# Altium PCB PcbDoc_JavierLopezIniesta_RodrigoMoratilla.PcbDoc (part 2 of 2)
Units mm, origin at the board's own origin, x right, y up, seen from the top; angles counter-clockwise.
Board outline 50 x 50 mm, 4 copper layers (Top Layer, Int1 (GND), Int2 (PWR), Bottom Layer), stack 1.369 mm thick; 104 components, 112 nets, 567 pads, 251 vias.
Unrouted connection lines stored in the file: 2.
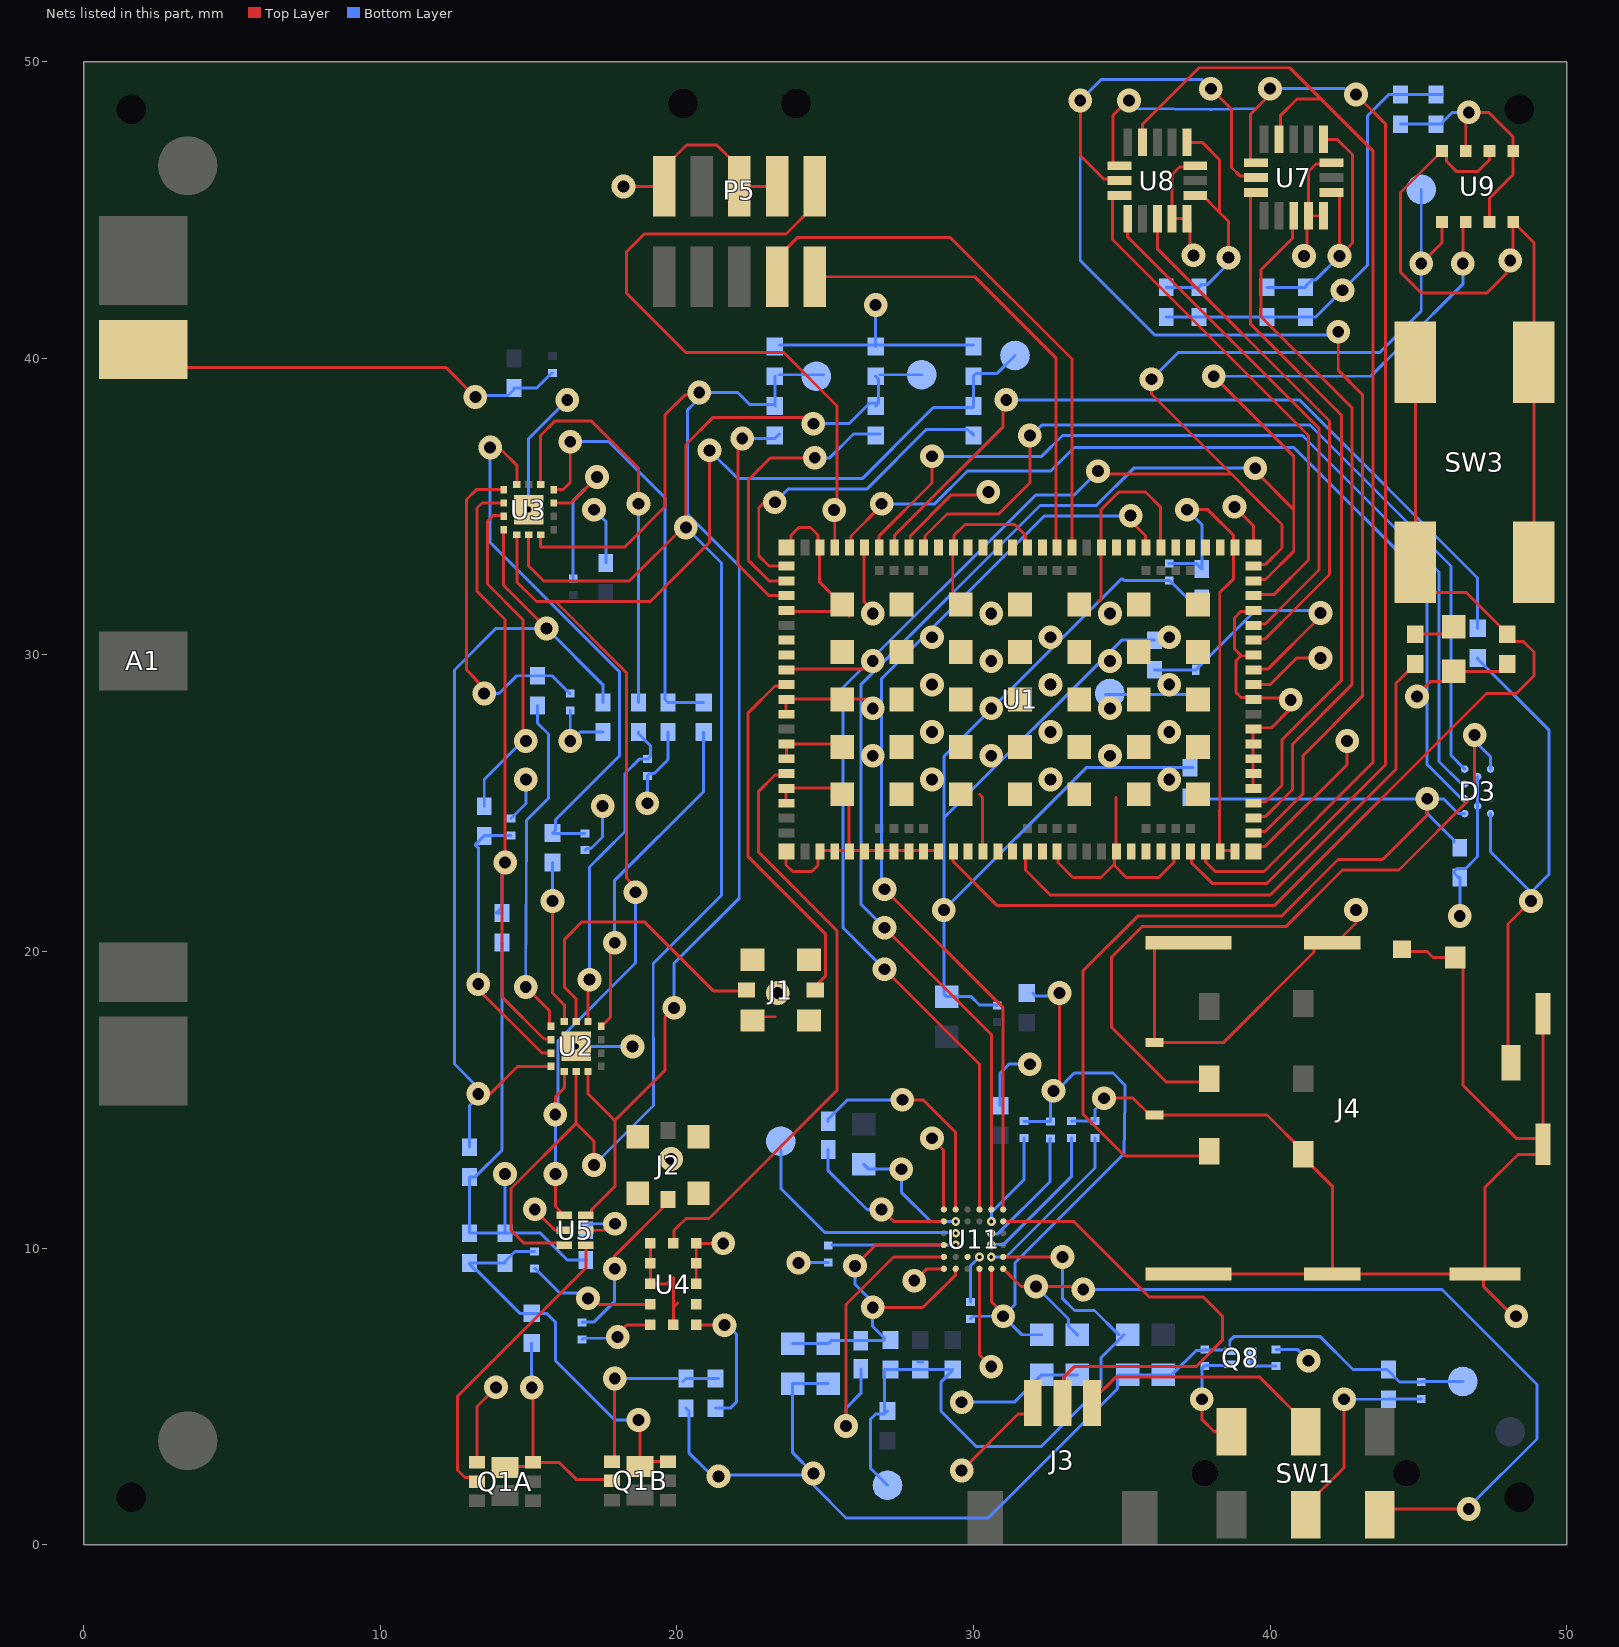
[diagram p4: the nets of this part, all layers, seen from the top]

## Via types
v1: diameter 0.8, hole 0.4, Int2 (PWR) to Bottom Layer, 82 vias
v2: diameter 0.8 (per signal layer), hole 0.4, Top Layer to Int2 (PWR), 64 vias
v3: diameter 0.8, hole 0.4, Top Layer to Int1 (GND), 46 vias
v4: diameter 0.8, hole 0.4, Top Layer to Int2 (PWR), 18 vias
v5: diameter 0.8, hole 0.4, Int1 (GND) to Bottom Layer, 14 vias
v6: diameter 0.3, hole 0.13, Top Layer to Bottom Layer, 10 vias
v7: diameter 0.8, hole 0.4, Top Layer to Bottom Layer, 8 vias
v8: diameter 0.8 (per signal layer), hole 0.4, Int1 (GND) to Bottom Layer, 6 vias
v9: diameter 0.5, hole 0.2, Top Layer to Bottom Layer, 2 vias
v10: diameter 0.3, hole 0.12, Top Layer to Bottom Layer, 1 vias

## Nets (pads, with @x,y where several pads share a name; then routed paths per layer and width w, separated by ;. In a path a pad name is that pad's centre, name@x,y a point inside that pad or via, vN(x,y) a via of type N, cw(c..) or ccw(c..) an arc to the next point about the centre after c; other vN are vias at no path point) (continued)
GND: C1.1 C2.1 C3.1 C4.1 C5.1 C6.1 C7.1 C8.1 C12.1 C13.1 C14.1 C16.1 C17.1 C36.1 C37.1 C38.1 C39.1 C40.1 C41.1 C43.1 C44.1 C46.1 C47.1 C48.1 C49.1 C50.1 C51.1 C52.1 C53.1 C54.1 D2.1 D3.B1 D3.B2 J1.2 J2.2 J3.1 J4.0 J4.C5 J4.CSW L4.1 L5.1 L6.1 L7.1 P5.3 P5.5 P5.9 Q1A.1 Q8.2 R4.1 R5.1 R6.1 R12.1 R26.1 R32.1 R35.1 R36.1 R37.1 R48.1 SW3.2 TP6.1 U1.1 U1.5 U1.6 U1.7 U1.8 U1.9 U1.11 U1.14 U1.17 U1.21 U1.27 U1.31 U1.36 U1.41 U1.44 U1.47 U1.50 U1.52 U1.56 U1.60 U1.62 U1.63 U1.65 U1.66 U1.68 U1.69 U1.72 U1.74 U1.75 U1.76 U1.77 U1.78 U1.79 U1.80 U1.81 U1.82 U1.85 U1.90 U1.94 U1.98 U1.103 U2.15 U3.15 U4.2 U4.4 U4.5 U4.6 U4.7 U4.9 U4.10 U4.11 U5.2 U7.12 U7.13 U7.16 U8.12 U8.13 U8.16 U9.1 U9.5 U9.7 U11.A1 U11.B2 U11.F1 U11.F4 | length 349.1
  Top Layer w0.1: Q1A.1@13.255,2.775 13.255,4.659 v3(13.898,5.302) ; v3(15.203,11.303) 15.203,11.28 15.883,10.6 U5.2@16.2,10.6 ; v3(18.2,45.8) 19.56,45.8 P5.9@19.565,45.805 19.565,46.44 20.325,47.2 21.345,47.2 22.105,46.44 P5.5@22.105,45.805 P5.3@23.375,45.805 ; U4.9@19.1,10.158 U4.10@19.1,9.484 U4.11@19.1,8.792 19.667,8.792 19.875,9 19.875,8 ; U4.2@19.875,7.408 19.875,8 ; 20.025,8.15 19.875,8 ; U4.5@20.65,8.792 U4.6@20.65,9.484 U4.7@20.65,10.158 v3(21.558,10.158) ; J1.2@22.55,17.675 22.675,17.8 23.3,17.8 ; U1.56@23.654,31.454 U1.56@23.7,31.5 ; U1.72@23.68,23.4 23.68,22.921 23.9,22.7 24.541,22.7 24.754,22.913 24.754,23.354 24.8,23.4 U1.76@25.8,23.4 ; U1.69@23.68,25.02 23.68,25.52 25.35,25.52 U1.103@25.55,25.32 ; U1.63@23.68,28.02 23.68,28.52 26.58,28.52 v3@26.6,28.5 ; U1.60@23.68,29.52 26.52,29.52 v3@26.6,29.6 ; U1.56@23.68,31.52 23.726,31.474 25.626,31.474 U1.103@25.8,31.3 ; U1.52@23.68,33.64 23.846,33.806 23.846,34.036 24.11,34.3 24.5,34.3 24.754,34.046 24.754,33.686 24.8,33.64 24.8,32.47 U1.103@25.55,31.72 ; U1.66@23.7,26.5 U1.65@23.7,27 25.47,27 U1.103@25.57,26.9 ; U1.63@23.7,28 U1.63@23.746,27.954 ; U1.103@25.23,25.26 25.25,25.24 25.27,25.26 25.77,25.26 25.8,25.23 U1.76@25.8,23.4 ; U1.103@25.52,27.18 25.645,27.055 U1.103@25.61,27.02 ; U1.47@26.3,33.64 26.3,31.8 v3@26.4,31.7 ; U1.103@27.27,25.26 U1.103@27.77,25.26 ; U1.44@27.82,33.62 27.866,33.666 27.866,34.017 29.249,35.4 30.4,35.4 v3(30.5,35.5) ; v3@28,9.146 v3(28,8.9) 28.024,8.9 28.424,9.3 28.915,9.3 ccw(c29,9.7) 28.991,9.291 U11.F1@29,9.3 ; v3(28.6,13.7) 28.991,13.309 28.991,11.309 U11.A1@29,11.3 ; U1.82@28.8,23.4 U1.76@25.8,23.4 ; U1.103@29.55,31.72 29.3,31.97 29.3,33.64 29.346,33.686 29.346,34.036 29.71,34.4 31.39,34.4 31.754,34.036 31.754,33.686 U1.36@31.8,33.64 ; v3(29.6,2.5) 31.5,4.4 31.75,4.4 32,4.65 J3.1@32,4.775 ; U11.F4@30.2,9.3 30.2,6.4 v3(30.6,6) 30.6,6.195 v3@30.5,6.295 ; 30.2,25.3 30.3,25.2 U1.85@30.3,23.4 ; U1.90@32.8,23.4 32.846,23.354 32.846,23.004 33.35,22.5 34.3,22.5 34.754,22.954 ; 34.2,31.8 34.3,31.9 U1.31@34.3,33.53 ; U1.31@34.27,33.5 U1.31@34.3,33.53 ; U1.31@34.316,33.546 U1.31@34.3,33.53 ; v1(34.404,15.052) 35.383,15.052 35.95,14.485 J4.0@36.1,14.485 39.9,14.485 41.12,13.265 J4.C5@41.12,13.165 41.12,13.065 42.1,12.085 J4.0@42.1,9.125 ; 34.8,25.2 34.8,23.4 34.754,23.354 34.754,22.954 ; U1.27@36.3,33.64 36.3,35 35.8,35.5 34.9,35.5 34.3,34.9 U1.31@34.3,33.53 ; U1.98@36.8,23.4 36.754,23.354 36.754,23.004 36.25,22.5 35.154,22.5 34.754,22.9 34.754,22.954 ; J4.0@37.25,9.125 J4.0@42.1,9.125 ; J4.0@37.25,20.3 36.275,20.3 36.1,20.125 J4.0@36.1,16.925 38.425,16.925 41.484,19.984 41.484,20.125 41.659,20.3 42.241,20.3 42.9,20.959 v3(42.9,21.4) ; v3(37.42,43.476) 37.3,43.596 37.3,44.612 U8.13@37.2,44.712 U8.12@36.7,44.712 36.7,46.205 36.949,46.454 37.429,46.454 U8.16@37.475,46.5 ; v3(38.8,34.996) 39.44,34.356 U1.21@39.44,33.62 ; U1.5@39.42,25.52 39.42,27.52 39.446,27.546 40.046,27.546 40.7,28.2 v3(40.7,28.487) ; U1.14@39.42,30.02 39.374,29.974 39.026,29.974 ; U1.17@39.42,31.52 39.374,31.474 39.024,31.474 38.8,31.25 38.8,30.2 39.026,29.974 ; U1.1@39.44,23.38 39.606,23.546 39.838,23.546 42.6,26.308 v3(42.6,27.1) ; v3@40.641,28.546 39.486,28.546 U1.11@39.44,28.5 39.374,28.566 39.024,28.566 38.846,28.744 38.846,29.796 39.024,29.974 39.026,29.974 ; v3(41.148,43.452) 41.254,43.558 41.254,44.766 U7.12@41.3,44.812 ; U7.13@41.8,44.812 U7.12@41.3,44.812 ; U7.16@42.075,46.6 42.029,46.554 41.549,46.554 41.3,46.305 U7.12@41.3,44.812 ; J4.CSW@44.45,20.075 44.525,20 45.3,20 45.5,19.8 J4.0@46.25,19.8 46.5,19.55 46.5,15.5 48.3,13.7 49.005,13.7 J4.0@49.2,13.505 ; v3(44.958,28.6) 44.958,28.658 45.4,29.1 45.85,29.1 D2.1@46.2,29.45 47.775,29.45 48,29.675 R12.1@48,29.7 ; U9.7@47.4,47 47.4,46.7 47,46.3 46.3,46.3 45.95,46.65 45.95,46.85 U9.5@45.8,47 44.396,45.596 44.396,42.908 45.104,42.2 47.3,42.2 47.966,42.866 47.966,43.166 v3(48.1,43.3) 48.2,43.4 U9.1@48.2,44.6 48.9,43.9 SW3.2@48.9,39.875 SW3.2@48.9,33.125 ; v3(48.3,7.7) 48.2,7.7 47.191,8.709 47.191,9.066 J4.0@47.25,9.125 ; J4.0@49.2,17.905 J4.0@49.2,13.505 ; J4.0@42.1,9.125 J4.0@47.25,9.125 ; J4.0@47.25,9.125 47.25,12.05 48.359,13.159 49,13.159 49.2,13.359 J4.0@49.2,13.505
  Bottom Layer w0.1: C12.1@14.1,20.3 14.1,13.3 13.2,12.4 C16.1@13,12.4 C6.1@13,10.5 C5.1@14.2,10.5 ; v8(14.2,12.5) C5.1@14.2,10.5 ; L4.1@14.4,24.485 14.904,24.989 v8(14.904,25.8) ; v9(15,34.9) 15,37.3 15.918,38.218 v5(16.3,38.6) ; L6.1@16.415,28.13 L6.1@16.4,28.13 v8(16.4,27.1) 16.436,27.1 16.736,27.4 C17.1@17.5,27.4 ; v9(16.6,16.8) v5(18.5,16.8) ; L7.1@16.9,23.415 16.955,23.47 17.1,23.47 17.492,23.862 v5(17.492,24.904) ; C8.1@16.925,9.6 16.3,9.6 15.4,10.5 C5.1@14.2,10.5 ; v8(17.204,34.9) 17.6,34.504 C13.1@17.6,33.1 ; v5(19,25) 19,25.4 L5.1@19,25.915 19.085,26 19.23,26 19.7,26.47 C14.1@19.7,27.4 ; C7.1@20.3,4.6 20.4,4.5 20.4,3.1 21,2.5 21.011,2.5 21.211,2.3 v5(21.4,2.3) 21.45,2.35 24.55,2.35 v5(24.6,2.4) ; R6.1@23.45,40.45 R5.1@26.7,40.45 ; v5(24.1,9.5) 24.107,9.507 25.092,9.507 R26.1@25.1,9.515 ; C47.1@25.1,5.425 C46.1@23.9,5.425 23.9,3.1 v5(24.6,2.4) ; C49.1@26.3,12.825 26.466,12.659 v5(27.566,12.659) 27.566,11.884 28.55,10.9 v6(29.4,10.9) ; R5.1@26.7,40.4 R5.1@26.7,40.45 ; v8(26.7,41.8) R5.1@26.7,40.45 ; v5(29.6,4.8) 31.375,4.8 C52.1@32.3,5.725 C53.1@33.5,5.725 ; R4.1@30,40.45 26.85,40.45 R5.1@26.7,40.45 ; R35.1@30.8,18.185 30.785,18.2 30.2,18.2 29.925,18.475 C48.1@29.1,18.475 29,18.575 v3(29,21.4) ; R32.1@30.9,14.8 30.9,15.9 31.2,16.2 v5(31.9,16.2) ; R36.1@33.3,14.285 R37.1@34.1,14.285 34.1,14.668 34.352,14.92 34.352,14.965 34.352,15 v1(34.404,15.052) ; C3.1@36.1,30.5 35,30.5 29,24.5 ; C39.1@36.5,41.4 C38.1@37.6,41.4 C37.1@39.9,41.4 C36.1@41.2,41.4 41.542,41.4 v5(42.442,42.3) 43.283,43.141 43.283,48.183 44,48.9 C41.1@44.4,48.9 C40.1@45.8,48.9 ; C4.1@37.397,26.2 33.8,26.2 v3(29,21.4) ; C2.1@37.7,31.9 37.23,31.9 36.615,32.515 C1.1@36.6,32.515 35.085,32.515 35.041,32.559 34.98,32.559 29,26.579 29,24.5 ; Q8.2@38.65,6.525 Q8.2@38.641,6.534 ; v8(46.4,21.2) C54.1@46.4,22.45 ; C54.1@46.4,22.5 C54.1@46.4,22.45 ; TP6.1@46.5,5.5 46.493,5.492 45.107,5.492 C44.1@45.1,5.485 44.365,5.485 43.95,5.9 42.8,5.9 41.676,7.024 38.79,7.024 38.641,6.876 Q8.2@38.641,6.534 ; D3.B1@47,25.9 D3.B2@47,24.9 47,24.4 47,23.2 46.6,22.8 46.3,22.8 46.2,22.7 46.2,22.65 C54.1@46.4,22.45 ; v5(24.6,2.4) 24.644,2.356 24.644,1.956 25.7,0.9 30.5,0.9 34.859,5.259 34.859,5.684 34.9,5.725 C50.1@36.4,5.725 36.688,5.725 37.5,6.538 37.753,6.538 R48.1@37.8,6.585 37.83,6.555 38.62,6.555 Q8.2@38.641,6.534 ; v3(29,21.4) 29,24.5
  other v3: 19.8,13 23.4,18.6 28.6,25.8 32.6,25.8 36.6,25.8 26.6,26.6 30.6,26.6 34.6,26.6 28.6,27.4 32.6,27.4 36.6,27.4 26.6,28.2 30.6,28.2 34.6,28.2 28.6,29 32.6,29 36.6,29 26.6,29.8 30.6,29.8 34.6,29.8 28.6,30.6 32.6,30.6 36.6,30.6 26.6,31.4 30.6,31.4 34.6,31.4
  other v4: 34.404,15.052
  other v5: 29,21.4
GPS_EN: C7.2 Q1B.1 R7.1 | length 6.2
  Top Layer w0.1: Q1B.1@17.81,2.8 17.9,2.89 v2(17.9,5.6)
  Bottom Layer w0.1: v2(17.9,5.6) 20,5.6 ; C7.2@20.2,5.5 C7.2@20.3,5.6 R7.1@21.4,5.6
  other v1: 17.9,5.6
GPS_LNA: J2.1 L1.2 | length 5.6
  Top Layer w0.1: v2(17.9,9.3) 17.9,9.738 J2.1@19.701,11.539 ; J2.1@19.6,11.54 J2.1@19.7,11.64
  Bottom Layer w0.1: L1.2@16.815,7.485 L1.2@16.8,7.485 16.815,7.5 17.191,7.5 17.9,8.209 v2(17.9,9.3)
  other v1: 17.9,9.3
GPS_LNA_IN: L1.1 U4.1 | length 2.6
  Top Layer w0.1: v1(18,7) 18,7.1 18.308,7.408 U4.1@19.1,7.408
  Bottom Layer w0.1: L1.1@16.8,6.915 16.843,6.958 17.958,6.958 v1(18,7)
  other v2: 18,7
GPS_RF: U1.67 U4.8 | length 20.3
  Top Layer w0.1: U4.8@19.875,10.166 19.9,10.191 19.9,10.6 20.3,11 21.08,11 25.4,15.32 25.4,20.7 22.754,23.346 22.754,25.404 23.304,25.954 23.654,25.954 U1.67@23.7,26
ICS: R37.2 U11.E5 | length 5.8
  Bottom Layer w0.1: v6(30.6,9.7) 31.099,9.7 34.1,12.701 R37.2@34.1,13.715
ILIM: R36.2 U11.D5 | length 5
  Bottom Layer w0.1: v6(30.6,10.1) 30.625,10.125 31.024,10.125 33.3,12.401 R36.2@33.3,13.715
LTE_RF: J1.1 U2.13 | length 10.1
  Top Layer w0.1: U2.13@16.6,17.645 16.6,18.399 16.2,18.799 16.2,20.4 16.8,21 18.9,21 21.225,18.675 J1.1@22.19,18.675
M\R\: R34.1 U11.E4 | length 1.6
  Bottom Layer w0.1: R34.1@29.9,8.185 29.9,9.4 v6(30.2,9.7)
NetA1_2: A1.2 C15.1 L8.2 | length 14.8
  Top Layer w0.1: A1.2@2,40.3 2.6,39.7 12.2,39.7 v2(13.2,38.7)
  Bottom Layer w0.1: v2(13.2,38.7) 13.25,38.75 14.3,38.75 14.5,38.95 C15.1@14.5,39 15.27,39 15.785,39.515 L8.2@15.8,39.515
  other v1: 13.2,38.7
NetC1_1:  | length 0.5
  Top Layer w0.1: 16.174,17.004 16.396,17.004 16.6,16.8
NetC3_2: C3.2 D1.1 U1.13 | length 9.6
  Top Layer w0.1: U1.13@39.42,29.52 39.92,29.52 41.7,31.3 v7(41.7,31.414)
  Bottom Layer w0.1: C3.2@36.1,29.5 D1.1@37.5,29.5 39.5,31.5 41.614,31.5 v7(41.7,31.414)
NetD1_2: D1.2 TP1.1 | length 3
  Bottom Layer w0.1: TP1.1@34.45,28.66 D1.2@37.5,28.66
NetD2_2: D2.2 R11.1 | length 1.2
  Top Layer w0.1: R11.1@44.9,30.7 45.95,30.7 D2.2@46.075,30.825
NetD3_C4: D3.C4 J4.DSW R38.2 | length 17.8
  Top Layer w0.1: J4.DSW@48.025,16.855 48.025,20.925 v2(48.8,21.7)
  Bottom Layer w0.1: R38.2@47,29.9 47,29.875 49.4,27.475 49.4,22.6 48.968,22.168 48.968,22.158 48.811,22 v1@48.8,22 ; D3.C4@47.435,24.65 47.435,23.365 v1@48.8,22 ; v2(48.8,21.7) v1@48.8,22
  other v1: 48.8,21.7
NetL2_1: L2.1 U4.12 | length 4.4
  Top Layer w0.1: v1(16.998,8.302) 17.187,8.302 17.389,8.1 U4.12@19.1,8.1
  Bottom Layer w0.1: L2.1@15.2,9.315 15.215,9.315 16.05,8.48 16.82,8.48 16.9,8.4 v1(16.998,8.302)
  other v2: 16.998,8.302
NetQ1A_2: Q1A.2 U5.4 | length 10.2
  Top Layer w0.1: Q1A.2@13.255,2.125 13.119,2.261 12.854,2.261 12.6,2.515 12.6,5 16.925,9.325 U5.4@16.925,10.1
NetQ1A_6: Q1A.6 Q1B.2 R8.2 | length 8
  Top Layer w0.1: Q1A.6@14.2,2.6 14.239,2.639 15.009,2.639 Q1A.6@15.145,2.775 ; v1(15.1,5.3) 15.141,5.259 15.141,3.39 15.145,3.386 Q1A.6@15.145,2.775 ; Q1B.2@17.81,2.15 17.76,2.2 16.6,2.2 16.025,2.775 Q1A.6@15.145,2.775
  Bottom Layer w0.1: v1(15.1,5.3) 15.1,5.6 R8.2@15.1,6.8
  other v2: 15.1,5.3
NetQ8_1: Q8.1 R48.2 SW1.4 | length 3.9
  Top Layer w0.1: v1(37.7,4.9) 37.7,4.225 38.109,3.816 38.684,3.816 SW1.4@38.7,3.8
  Bottom Layer w0.1: v1(37.7,4.9) 37.7,5.93 37.785,6.015 R48.2@37.8,6.015 37.83,6.045 38.62,6.045 Q8.1@38.65,6.075
  other v4: 37.7,4.9
NetQ8_3: Q8.3 R47.1 | length 1
  Bottom Layer w0.1: Q8.3@39.35,6.3 39.35,6.165 39.5,6.015 R47.1@40.2,6.015
NetR1_1: R1.1 U1.55 | length 7.7
  Top Layer w0.1: v1(22.2,37.3) 22.05,37.15 22.05,33.049 23.099,32 U1.55@23.7,32
  Bottom Layer w0.1: v1(22.2,37.3) 23.3,37.3 R1.1@23.45,37.45
  other v4: 22.2,37.3
NetR2_1: R2.1 U1.54 | length 9.4
  Top Layer w0.1: U1.54@23.7,32.5 23.1,32.5 22.404,33.196 22.404,35.904 23.146,36.646 24.642,36.646 v1(24.646,36.65)
  Bottom Layer w0.1: v1(24.646,36.65) 25.151,36.65 25.951,37.45 R2.1@26.85,37.45
  other v4: 24.646,36.65
NetR3_1: R3.1 U1.53 | length 11.2
  Top Layer w0.1: v1(23.3,35.15) 22.95,35.15 22.758,34.958 22.758,33.343 23.101,33 U1.53@23.7,33
  Bottom Layer w0.1: v1(23.3,35.15) 23.742,35.592 26.398,35.592 28.406,37.6 29.8,37.6 R3.1@30,37.4 ; R3.1@29.948,37.502 29.977,37.473 R3.1@30,37.45
  other v4: 23.3,35.15
NetR7_2: R7.2 U4.3 | length 4.6
  Top Layer w0.1: U4.3@20.65,7.408 20.658,7.4 v1(21.6,7.4)
  Bottom Layer w0.1: R7.2@21.3,4.6 21.8,4.6 22,4.8 22,7.1 21.7,7.4 v1(21.6,7.4)
  other v4: 21.6,7.4
NetU1_2: U1.2 U7.7 U8.7 | length 46.4
  Top Layer w0.1: v2(33.6,48.7) 33.6,46.845 34.399,46.046 34.879,46.046 U8.7@34.925,46 ; v1(38.004,49.096) 38.008,49.096 38.702,48.402 38.702,46.443 38.999,46.146 39.479,46.146 U7.7@39.525,46.1 ; U1.2@39.44,24 39.486,24.046 39.837,24.046 41.108,25.317 41.108,26.604 43.112,28.608 43.112,38.788 42.3,39.6 v1(42.3,40.9)
  Bottom Layer w0.1: v1(38.004,49.096) 37.7,49.4 34.3,49.4 v2(33.6,48.7) 33.6,43.3 36.104,40.796 42.196,40.796 v1(42.3,40.9)
  other v1: 33.6,48.7
  other v2: 38.004,49.096
  other v4: 42.3,40.9
nRF91_SWDCLK: P5.4 U1.33 | length 18.9
  Top Layer w0.1: P5.4@23.375,42.755 23.375,43.39 24.059,44.074 25.922,44.074 29.227,44.074 33.32,39.981 33.32,33.66 U1.33@33.3,33.64
nRF91_SWDIO: P5.2 U1.34 | length 15.8
  Top Layer w0.1: P5.2@24.645,42.755 30.045,42.755 32.774,40.026 32.774,36.729 32.774,33.97 U1.34@32.774,33.466
P0.00: U1.95
P0.01: U1.96
P0.02: U1.97
P0.03: U1.99 U7.6 U8.6 | length 45.6
  Top Layer w0.1: U8.6@34.925,46.5 34.8,46.5 34.7,46.6 34.7,48.2 35.196,48.696 v1(35.243,48.696) ; U1.99@37.346,23.384 37.346,23.003 38.049,22.3 39.897,22.3 43.896,26.299 43.896,41.376 43.9,41.38 43.9,47.9 v1(42.9,48.9) ; U7.6@39.525,46.6 39.446,46.6 39.346,46.7 39.346,48.246 40,48.9 v2(40,49.1)
  Bottom Layer w0.1: v1(35.243,48.696) 35.511,48.428 35.551,48.427 37.994,48.392 ccw(c38.004,49.096) 38.02,48.392 39.525,48.425 40,48.9 v2(40,49.1) 42.511,49.1 42.711,48.9 v1(42.9,48.9)
  other v1: 40,49.1
  other v2: 35.243,48.696
  other v4: 42.9,48.9
P0.04: U1.100 U7.4 U8.4 | length 41
  Top Layer w0.1: U8.4@35.7,47.287 35.7,47.9 37.604,49.804 40.666,49.804 41.697,48.773 43.466,47.004 43.466,26.37 39.796,22.7 38.15,22.7 37.816,23.034 U1.100@37.816,23.414 ; U7.4@40.3,47.387 40.346,47.433 40.346,48.187 40.909,48.75 41.674,48.75
P0.06: U1.3 U7.11 | length 23.6
  Top Layer w0.1: U1.3@39.44,24.5 39.486,24.546 39.837,24.546 40.754,25.463 40.754,26.992 42.758,28.996 42.758,38.342 39.7,41.4 39.7,43 40.754,44.054 40.754,44.767 U7.11@40.8,44.812
P0.07: U1.4 U7.8 | length 23.4
  Top Layer w0.1: U1.4@39.44,25 39.486,25.046 39.836,25.046 40.4,25.61 40.4,27.139 42.404,29.143 42.404,38.096 39.346,41.154 39.346,45.5 39.446,45.6 U7.8@39.525,45.6
P0.08: U1.15 U8.11 | length 17.9
  Top Layer w0.1: U8.11@36.2,44.712 36.2,43.7 42.008,37.892 42.008,32.717 40.996,31.705 39.837,30.546 39.486,30.546 U1.15@39.44,30.5
P0.09: U1.16 U8.9 | length 17.5
  Top Layer w0.1: U8.9@35.2,44.712 35.2,44.1 41.654,37.646 41.654,32.864 40.642,31.852 39.836,31.046 39.486,31.046 U1.16@39.44,31
P0.10: U1.18 U8.8 | length 17.4
  Top Layer w0.1: U8.8@34.75,45.45 34.741,45.45 34.691,45.4 34.691,44.009 41.3,37.4 41.3,33.2 40.146,32.046 39.486,32.046 U1.18@39.44,32
P0.11: U1.19 U9.3 U11.A5 | length 58.4
  Top Layer w0.1: v2(27,20.8) 30.6,17.2 U11.A5@30.6,11.3 ; v1(38.1,39.4) 40.8,36.7 40.8,34.9 ; U1.19@39.44,32.5 39.486,32.546 39.846,32.546 40.8,33.5 40.8,34.9 ; v1(39.5,36.296) 39.5,36.2 40.8,34.9 ; v2(46.5,43.2) 46.5,44.5 U9.3@46.6,44.6
  Bottom Layer w0.1: v2(27,20.8) 26.2,21.6 26.2,28.999 32.242,35.041 34.141,35.041 35.4,36.3 39.496,36.3 v1(39.5,36.296) ; v1(38.1,39.4) 43.4,39.4 44.5,40.5 46.5,42.5 v2(46.5,43.2)
  other v1: 27,20.8 46.5,43.2
  other v2: 39.5,36.296
  other v4: 38.1,39.4
P0.12: TP9.1 U1.20 U9.4 U11.A4 | length 60.2
  Top Layer w0.1: v2(27,19.4) 30.2,16.2 U11.A4@30.2,11.3 ; v1(34.2,36.2) 34.3,36.1 38.7,36.1 ; v1(36,39.3) 36,38.8 38.7,36.1 ; U1.20@39.44,33 39.486,33.046 39.836,33.046 40.4,33.61 40.4,34.4 39.69,35.11 38.7,36.1 ; v2(45.1,43.2) 45.8,43.9 U9.4@45.8,44.6
  Bottom Layer w0.1: v2(27,19.4) 25.6,20.8 25.6,28.9 32.096,35.395 33.395,35.395 v1(34.2,36.2) ; v1(36,39.3) 36.896,40.196 43.695,40.196 45.1,41.601 v2(45.1,43.2) TP9.1@45.1,45.7
  other v1: 27,19.4 45.1,43.2
  other v4: 34.2,36.2 36,39.3
P0.13/AIN0: U1.23
P0.14/AIN1: U1.24
P0.15/AIN2: U1.25
P0.16/AIN3: U1.26
P0.17/AIN4: U1.28 U11.A6 | length 31.5
  Top Layer w0.1: v2(27,22.1) 31,18.1 U11.A6@31,11.3 ; v7(35.3,34.7) 35.3,34.519 35.8,34.019 U1.28@35.8,33.64
  Bottom Layer w0.1: v2(27,22.1) 26.9,22.2 26.9,29.199 32.389,34.687 35.288,34.687 v7(35.3,34.7)
  other v1: 27,22.1
P0.18/AIN5: U1.29
P0.19/AIN6: U1.30
P0.20/AIN7: U1.35
P0.21: U1.37
P0.22: U1.38
P0.23: U1.39
P0.24: U1.40
P0.25: U1.42
P0.26: R12.2 SW3.1 U1.83 | length 37
  Top Layer w0.1: U1.83@29.316,23.414 29.316,23.034 30.804,21.546 40.144,21.546 47.298,28.7 48.3,28.7 48.9,29.3 48.9,30.1 48.55,30.45 48.225,30.45 48,30.675 R12.2@48,30.7 48,30.725 46.625,32.1 45.245,32.1 44.9,32.445 SW3.1@44.9,33.125 SW3.1@44.9,39.875
P0.27: U1.84
P0.28: U1.86
P0.29: U1.87
P0.30: R11.2 U1.88 | length 19.1
  Top Layer w0.1: U1.88@31.75,23.44 31.75,22.75 32.6,21.9 39.997,21.9 44.254,26.157 44.254,29.054 44.65,29.45 44.675,29.45 44.9,29.675 R11.2@44.9,29.7
P0.31: U1.89
PGOOD1: R27.2 U11.B5 | length 3.3
  Bottom Layer w0.1: v6(30.6,10.9) 30.6,11.2 31.7,12.3 R27.2@31.7,13.715
PGOOD2: R28.2 U11.C5 | length 4
  Bottom Layer w0.1: 30.77,10.479 30.821,10.479 32.572,12.23 32.572,13.672 R28.2@32.6,13.7
  other v6: 30.6,10.5
R\E\S\E\T\: U11.E3
RF: J1.3 U1.61 | length 12.4
  Top Layer w0.1: U1.61@23.7,29 23.654,28.954 23.304,28.954 22.4,28.05 22.4,23.199 25.004,20.595 25.004,19.169 J1.3@24.51,18.675
RF_SW1: R1.2 R6.2 TP3.1 U2.7 U3.7 U5.6 | length 47.9
  Top Layer w0.1: U3.7@15.4,34.055 15.4,33.636 18.232,33.636 19.6,35.004 19.6,38.1 20.261,38.761 20.661,38.761 v1(20.75,38.85) ; U5.6@16.925,11.1 17.05,11.1 17.125,11.175 17.125,11.3 17.904,12.079 17.904,14.296 17.9,14.3 ; U2.7@17,15.955 17,15.2 17.9,14.3 ; v1(19.904,18.1) 19.9,18.1 19.596,17.796 19.596,15.996 17.9,14.3
  Bottom Layer w0.1: v1(19.904,18.1) 19.9,18.128 19.9,19.6 22.1,21.8 22.1,33.001 22.05,33.051 20.35,34.751 20.35,34.875 ccw(c19.65,34.95) 20.35,35.025 20.35,38.25 20.561,38.461 20.561,38.472 20.75,38.661 v1(20.75,38.85) 22.05,38.85 22.45,38.45 R1.2@23.3,38.45 ; R1.2@23.3,38.4 R1.2@23.3,38.45 ; R6.2@23.3,39.4 R1.2@23.3,38.45 ; R6.2@23.45,39.45 TP3.1@24.95,39.45
  other v2: 19.904,18.1 20.75,38.85
RF_SW2: R2.2 R5.2 TP10.1 U2.6 U3.6 U5.3 | length 53.5
  Top Layer w0.1: U3.6@15,34.055 15,33 15.5,32.5 18.4,32.5 20.2,34.3 v2(20.3,34.3) 20.3,37.096 21.208,38.004 24.396,38.004 v2(24.6,37.8) ; U5.3@16.2,10.1 16.129,10.171 14.829,10.171 14.4,10.6 14.4,12.004 16.6,14.204 ; U2.6@16.6,15.955 16.6,14.204 ; v2(17.2,12.8) 17.2,13.6 16.6,14.2 16.6,14.204
  Bottom Layer w0.1: v2(17.2,12.8) 19.204,14.804 19.204,17.092 19.2,17.096 19.2,19.596 21.5,21.896 21.5,33.1 v2(20.3,34.3) ; v2(24.6,37.8) 25.8,37.8 26.5,38.5 R2.2@26.8,38.5 ; R2.2@26.7,38.4 R2.2@26.8,38.5 ; R5.2@26.7,39.4 26.8,39.3 R2.2@26.8,38.5 ; R5.2@26.85,39.45 TP10.1@28.25,39.45
  other v1: 17.2,12.8 20.3,34.3 24.6,37.8
RF_SW3: R3.2 R4.2 TP2.1 U2.5 U3.5 U5.1 | length 49.9
  Top Layer w0.1: U3.5@14.6,34.055 14.6,33.79 14.6,33.7 14.6,32.459 15.259,31.8 15.9,31.8 ; v2(15.896,14.5) 15.896,15.096 16.2,15.4 16.2,15.69 U2.5@16.2,15.955 ; v2(15.9,12.5) 15.9,11.4 U5.1@16.2,11.1 ; v1(18.604,22) 18.604,22.162 18.296,22.47 18.296,29.404 15.9,31.8 ; v2(21.1,36.9) 21.1,33.8 19.1,31.8 15.9,31.8
  Bottom Layer w0.1: v2(15.9,12.5) 15.9,14.496 v2(15.896,14.5) 15.987,14.591 15.987,16.991 18.604,19.608 v1(18.604,22) ; v2(21.1,36.9) 22.054,35.946 26.251,35.946 27.279,36.974 27.279,36.98 28.644,38.345 R3.2@30,38.345 ; R3.2@30,38.4 R4.2@30,39.4 30.1,39.5 30.8,39.5 TP2.1@31.4,40.1
  other v1: 15.9,12.5 15.896,14.5 21.1,36.9
  other v2: 18.604,22
RST_1: D3.C1 J4.C2 | length 24.1
  Top Layer w0.1: J4.C2@37.9,15.605 37.895,15.6 36.496,15.6 34.646,17.45 34.646,19.801 35.683,20.838 40.532,20.838 42.44,22.746 44.346,22.746 46.899,25.299 v1(46.899,27.3)
  Bottom Layer w0.1: v1@46.9,27.1 47.435,26.565 D3.C1@47.435,26.15
  other v4: 46.899,27.3
SCIM_IO: D3.A3 U1.48 | length 30.9
  Top Layer w0.1: U1.48@25.82,33.62 25.866,33.666 25.866,34.016 26.902,35.052 v7(26.902,35.098)
  Bottom Layer w0.1: v7(26.902,35.098) 28.693,35.098 29.799,36.204 32.604,36.204 33.4,37 40.8,37 45.3,32.5 45.3,26.308 46.429,25.179 46.536,25.179 D3.A3@46.565,25.15
SCLK: U1.58
SDATA: U1.59
SIM_1V8: C4.2 C8.2 C46.2 C47.2 C54.2 D3.A4 J4.C1 L13.2 P5.1 R25.1 R47.2 U1.12 U1.49 U5.5 U11.D1 U11.F2 | length 76.4
  Top Layer w0.1: U5.5@16.925,10.6 17.6,10.6 17.819,10.819 v1(17.911,10.819) ; P5.1@24.645,45.805 24.645,45.17 23.675,44.2 18.9,44.2 18.3,43.6 18.3,42.55 18.3,42.2 18.68,41.82 18.68,41.816 20.295,40.2 23.6,40.2 25.4,38.4 25.4,34.988 v4(25.3,34.888) 25.32,34.868 U1.49@25.32,33.62 ; v5(26,9.4) 26.7,10.1 U11.D1@28.915,10.1 ; v2(26.6,8) 28.3,8 28.981,8.681 28.986,8.681 29.4,9.096 U11.F2@29.4,9.215 ; J4.C1@37.761,13.1 35.1,13.1 33.7,14.5 33.7,19.356 35.536,21.192 40.386,21.192 42.294,23.1 43.8,23.1 45.3,24.6 v7(45.3,25.15) ; U1.12@39.44,29 40,29 40.9,29.9 v4(41.7,29.9)
  Bottom Layer w0.1: C8.2@16.925,10.6 16.925,10.619 17.125,10.819 v1(17.911,10.819) ; C46.2@23.9,6.775 C47.2@25.1,6.775 25.2,6.875 L13.2@26.2,6.875 26.975,6.875 26.948,6.902 27,6.954 26.6,7.354 v2(26.6,8) 26.6,8.178 26,8.778 v5(26,9.4) ; C4.2@37.3,25.2 37.35,25.15 v7(45.3,25.15) ; R47.2@40.2,6.585 40.915,6.585 v1(41.3,6.2) ; C54.2@46.2,23.7 46.2,23.75 45.3,24.65 v7(45.3,25.15) ; D3.A4@46.565,24.65 46.35,24.65 45.85,25.15 v7(45.3,25.15)
  other v1: 26.6,8
  other v3: 26,9.4
  other v4: 17.911,10.819
SIM_CLK: D3.A2 U1.46 | length 30.7
  Top Layer w0.1: U1.46@26.82,33.62 26.82,34.02 28.6,35.8 v7(28.6,36.7)
  Bottom Layer w0.1: v7(28.6,36.7) 32.3,36.7 33,37.4 41.1,37.4 41.2,37.3 45.7,32.8 45.7,26.408 46.43,25.679 46.536,25.679 D3.A2@46.565,25.65
SIM_DET: R38.1 U1.45 | length 26.6
  Top Layer w0.1: U1.45@27.32,33.62 27.34,33.64 27.34,34.039 31,37.699 31,38.5 v1(31.104,38.604)
  Bottom Layer w0.1: v1(31.104,38.604) 35.7,38.604 35.708,38.596 41.004,38.596 47,32.6 R38.1@47,30.9
  other v2: 31.104,38.604
SIM_RST: D3.A1 U1.43 | length 29.8
  Top Layer w0.1: U1.43@28.32,33.62 28.366,33.666 28.366,34.016 29.104,34.754 30.854,34.754 31.9,35.8 31.9,37.3 v4@31.9,37.59
  Bottom Layer w0.1: v1(31.9,37.404) 31.952,37.404 32.302,37.754 41.345,37.754 46.1,32.999 46.1,26.615 D3.A1@46.565,26.15
  other v4: 31.9,37.404
STP: TP5.1 U11.C2 | length 7.7
  Bottom Layer w0.1: TP5.1@23.5,13.3 23.5,12.004 24.98,10.524 29.291,10.524 v6@29.315,10.5
  other v6: 29.4,10.5
SW1: L13.1 U11.E1 | length 10.2
  Top Layer w0.1: v7(25.7,4) 25.7,8.096 27.304,9.7 U11.E1@28.915,9.7 ; U11.E1@28.949,9.691 28.958,9.7 U11.E1@29,9.7
  Bottom Layer w0.1: v7(25.7,4) 25.7,4.6 26.2,5.1 L13.1@26.2,5.925
SW2A: L14.1 U11.B1 | length 5.6
  Top Layer w0.1: v2(26.9,11.3) 27.3,10.9 U11.B1@29,10.9
  Bottom Layer w0.1: L14.1@25.1,13.325 25.1,12.608 26.408,11.3 v2(26.9,11.3) v1@26.9,11.6
  other v1: 26.9,11.3
SW2B: L14.2 U11.A2 | length 7.6
  Top Layer w0.1: v2(27.6,15) 28.299,15 29.4,13.899 U11.A2@29.4,11.385
  Bottom Layer w0.1: L14.2@25.1,14.275 25.1,14.35 25.75,15 v2(27.6,15)
  other v1: 27.6,15
T1A: L7.2 R10.2 U3.14 | length 18.6
  Top Layer w0.1: v2(13.7,37) 13.8,36.9 14.1,36.9 14.6,36.4 14.6,36.01 U3.14@14.6,35.745
  Bottom Layer w0.1: v2(13.7,37) 13.7,33.796 18.054,29.442 18.054,26.596 15.9,24.442 15.9,24.1 R10.2@15.8,24 15.815,23.985 L7.2@16.9,23.985
  other v1: 13.7,37
T1F: R10.1 U2.14 | length 5.5
  Top Layer w0.1: v2(15.8,21.7) 15.8,18.6 16.2,18.2 16.2,17.89 U2.14@16.2,17.645
  Bottom Layer w0.1: v2(15.8,21.7) R10.1@15.8,23
  other v1: 15.8,21.7
T2A: C10.2 L6.2 U3.1 | length 11.7
  Top Layer w0.1: v2(13.496,28.7) 13.496,28.886 13.2,29.182 13.2,29.2 12.9,29.5 12.9,35.247 13.228,35.575 U3.1@14.155,35.575
  Bottom Layer w0.1: v1@13.553,28.643 v2(13.496,28.7) 14,28.7 14.6,29.3 C10.2@15.3,29.3 15.785,29.3 16.385,28.7 L6.2@16.4,28.7
  other v1: 13.496,28.7
T2F: C10.1 U2.1 | length 11.6
  Top Layer w0.1: v2(14.9,18.8) 15.7,18 15.7,17.53 U2.1@15.755,17.475
  Bottom Layer w0.1: v2(14.9,18.8) 14.924,24.424 15.665,25.165 15.665,27.335 15.3,27.7 C10.1@15.3,28.3
  other v1: 14.9,18.8
T3A: C12.2 U2.2 U3.2 | length 22.2
  Top Layer w0.1: U3.2@14.155,35.125 13.425,35.125 13.254,34.954 13.254,32.146 14.2,31.2 14.2,23.004 v2(14.204,23) 14.108,23 14.104,22.996 14.104,18.456 15.514,17.046 15.734,17.046 U2.2@15.755,17.025
  Bottom Layer w0.1: C12.2@14.1,21.3 13.9,21.3 14.1,21.5 14.1,22.9 14.159,22.959 v2(14.204,23)
  other v1: 14.204,23
T4A: C9.2 U3.3 | length 11.5
  Top Layer w0.1: U3.3@14.155,34.675 14.134,34.696 13.904,34.696 13.9,34.7 13.8,34.7 13.608,34.508 13.608,32.391 14.8,31.199 14.8,27.159 14.859,27.1 v2(14.904,27.1)
  Bottom Layer w0.1: C9.2@13.5,24.9 13.5,25.8 14.8,27.1 v2(14.904,27.1)
  other v1: 14.904,27.1
T4F: C9.1 L4.2 U2.3 | length 9.6
  Top Layer w0.1: v2(13.3,18.9) 13.3,18.719 15.444,16.575 U2.3@15.755,16.575
  Bottom Layer w0.1: v2(13.3,18.9) 13.3,23.5 13.2,23.6 C9.1@13.5,23.9 13.515,23.915 L4.2@14.4,23.915
  other v1: 13.3,18.9
T5A: C11.2 U3.12 | length 13.7
  Top Layer w0.1: U3.12@15.4,35.745 15.4,37.4 15.896,37.896 17.104,37.896 18.7,36.3 v2(18.7,35.1)
  Bottom Layer w0.1: C11.2@18.7,28.4 v2(18.7,35.1)
  other v1: 18.7,35.1
T5F: C11.1 L5.2 U2.12 | length 11
  Top Layer w0.1: U2.12@17,17.645 17,17.89 17,19 v1(17.05,19.05)
  Bottom Layer w0.1: v1(17.05,19.05) 17.05,22.85 17.546,23.346 18.246,24.047 18.246,26 18.731,26.485 L5.2@19,26.485 19.015,26.485 19.1,26.57 19.1,26.95 18.7,27.35 C11.1@18.7,27.4
  other v2: 17.05,19.05
T6A: C14.2 R9.2 U3.11 | length 14.2
  Top Layer w0.1: U3.11@15.845,35.575 16.156,35.575 16.4,35.819 v1(16.4,37.192)
  Bottom Layer w0.1: v1(16.4,37.192) 16.408,37.2 17.7,37.2 19.596,35.304 19.596,28.504 C14.2@19.7,28.4 R9.2@20.9,28.4
  other v2: 16.4,37.192
T6F: R9.1 U2.11 | length 11.4
  Top Layer w0.1: U2.11@17.445,17.475 17.754,17.784 17.754,20.154 17.896,20.296 v2(17.9,20.296)
  Bottom Layer w0.1: v2(17.9,20.296) 17.9,22.4 20.9,25.4 R9.1@20.9,27.4
  other v1: 17.9,20.296
T7A: L3.2 U3.10 | length 5.6
  Top Layer w0.1: U3.10@15.845,35.125 16.425,35.125 v2(17.3,36)
  Bottom Layer w0.1: L3.2@16.5,32.585 16.5,35.2 v2(17.3,36)
  other v1: 17.3,36
THR: J3.2 U11.B6 | length 16.3
  Top Layer w0.1: U11.B6@31,10.9 33.37,10.9 35.358,8.912 35.916,8.354 37.742,8.354 38.404,7.692 38.404,6.904 37.5,6 33.4,6 33.041,5.641 33.041,4.816 J3.2@33,4.775
VBUS: C53.2 SW1.3 U11.F6 | length 30.9
  Top Layer w0.1: U11.F6@31,9.3 31.6,8.7 32.1,8.7 33.6,8.7 v1(33.7,8.6) ; SW1.3@44.15,1.646 43.7,1.196 SW1.3@43.7,1 43.9,1.2 v2(46.7,1.2)
  Bottom Layer w0.1: v1(32.104,8.7) 33.2,7.604 33.2,7.375 C53.2@33.5,7.075 ; v1(33.7,8.6) 45.8,8.6 49,5.4 49,3.563 46.7,1.263 v2(46.7,1.2)
  other v1: 46.7,1.2
  other v2: 33.7,8.6 32.104,8.7
VBUS': C43.2 C44.2 SW1.2 | length 7
  Top Layer w0.1: SW1.2@41.2,1 41.2,1.3 42.5,2.6 v2(42.5,4.9)
  Bottom Layer w0.1: v2(42.5,4.9) C43.2@44,4.9 44.015,4.915 C44.2@45.1,4.915
  other v1: 42.5,4.9
VDD: C52.2 R27.1 R28.1 R33.2 R34.2 U11.F5 | length 23
  Top Layer w0.1: U11.F5@30.6,9.215 30.6,8.2 31,7.8 v5(31,7.7) ; v2(32.7,15.3) 32.9,15.5 v2(32.9,18.6)
  Bottom Layer w0.1: R34.2@29.9,7.615 29.985,7.7 30.059,7.7 v5(31,7.7) ; R27.1@31.7,14.285 31.7,14.27 R28.1@32.6,14.27 32.6,15.2 v2(32.7,15.3) 32.8,15.3 33.4,15.9 34.7,15.9 35.108,15.492 35.108,15.037 35.071,13.171 31.4,9.5 31.4,8.1 v5(31,7.7) ; R33.2@32,18.6 32.1,18.5 32.8,18.5 v2(32.9,18.6) ; C52.2@32.3,7.075 31.625,7.075 v5(31,7.7)
  other v1: 32.7,15.3 32.9,18.6
  other v7: 31,7.7
VDD_ADXL362: C38.2 C39.2 U8.1 U8.14 | length 8.5
  Top Layer w0.1: U8.1@37.2,47.287 37.713,47.287 38.3,46.7 38.3,44.925 ; U8.14@37.475,45.5 37.725,45.5 38.3,44.925 ; v2(38.6,43.4) 38.6,44.625 38.3,44.925
  Bottom Layer w0.1: C39.2@36.5,42.4 C38.2@37.6,42.4 37.7,42.5 37.9,42.5 38.6,43.2 v2(38.6,43.4)
  other v1: 38.6,43.4
VDD_ADXL372: C36.2 C37.2 U7.1 U7.14 | length 10.1
  Top Layer w0.1: U7.1@41.8,47.387 42.267,47.387 42.779,46.876 42.779,43.895 v2(42.342,43.458) 42.342,45.5 42.242,45.6 U7.14@42.075,45.6
  Bottom Layer w0.1: C37.2@39.9,42.4 C36.2@41.2,42.4 ; C36.2@41.2,42.45 C36.2@41.2,42.4 ; v2(42.342,43.458) 41.523,42.639 41.4,42.639 41.2,42.439 C36.2@41.2,42.4
  other v1: 42.342,43.458
VDD_BME: C40.2 C41.2 U9.2 U9.6 U9.8 | length 9.2
  Top Layer w0.1: U9.6@46.6,47 46.6,48.2 v2(46.7,48.3) 47.371,48.3 48.2,47.471 U9.8@48.2,47 48.2,46.2 47.4,45.4 U9.2@47.4,44.6
  Bottom Layer w0.1: C41.2@44.4,47.9 45.8,47.9 45.8,47.95 46.15,48.3 v2(46.7,48.3) v1@46.4,48.3
  other v1: 46.7,48.3
VDD_LNA: C5.2 C6.2 L2.2 Q1B.6 R8.1 | length 13.7
  Top Layer w0.1: v2(18.7,4.2) 18.7,4.1 18.759,4.041 18.759,3.959 18.755,3.955 Q1B.6@18.755,2.625 18.93,2.8 Q1B.6@19.7,2.8
  Bottom Layer w0.1: L2.2@15.2,9.885 14.535,9.885 14.2,9.55 C5.2@14.2,9.5 C6.2@13,9.5 13,9.45 13.2,9.25 13.25,9.25 14.7,7.8 R8.1@15.1,7.8 15.6,7.8 15.9,7.5 15.9,6.2 17.9,4.2 v2(18.7,4.2)
  other v1: 18.7,4.2
VDD_nRF91: C1.2 C2.2 U1.22 U1.101 U1.102 | length 16.6
  Top Layer w0.1: v7(37.2,34.9) 37.9,34.9 38.774,34.026 38.774,32.574 38.304,32.104 38.304,24.774 38.3,24.77 U1.101@38.3,23.4 ; U1.101@38.3,23.4 U1.102@38.8,23.4
  Bottom Layer w0.1: C1.2@36.6,33.085 37.515,33.085 C2.2@37.7,32.9 37.7,34.4 v7(37.2,34.9)
VDD_QM: C16.2 C17.2 U2.4 U3.4 | length 30.3
  Top Layer w0.1: v2(13.3,15.2) 13.7,15.2 14.625,16.125 U2.4@15.755,16.125 ; U3.4@14.155,34.225 14.155,32.345 15.596,30.904 v2(15.596,30.896)
  Bottom Layer w0.1: C16.2@13,13.4 13,14.8 13.3,15.1 13.3,15.4 12.496,16.204 12.496,29.496 13.9,30.9 15.592,30.9 v2(15.596,30.896) ; v1@15.6,30.9 17.5,29 C17.2@17.5,28.4
  other v1: 13.3,15.2 15.596,30.896
VID1: R26.2 U11.D2 | length 4.2
  Bottom Layer w0.1: R26.2@25.234,10.104 v6@29.396,10.104
  other v6: 29.4,10.1
VLi-Ion': J3.3 SW1.5 | length 8.5
  Top Layer w0.1: J3.3@34,4.775 34,4.85 34.796,5.646 39.654,5.646 41.2,4.1 SW1.5@41.2,3.8
VSYS: C51.2 R25.2 R29.1 R30.1 R31.2 TP7.1 U11.E6 | length 23.2
  Top Layer w0.1: U11.E6@31.085,9.7 v1(33,9.7)
  Bottom Layer w0.1: TP7.1@27.1,2 26.521,2.579 26.521,4.221 26.7,4.4 R31.2@27,4.4 ; R31.2@27.1,4.5 R31.2@27,4.4 ; R30.1@28.125,6.15 R30.1@28.275,6.15 ; R29.1@29.3,5.9 R29.1@29.25,5.85 ; v1(33,9.7) 32.996,9.696 32.996,8.308 33.408,7.896 34.079,7.896 C51.2@34.9,7.075 ; C51.2@35.075,7.075 34.3,6.3 34.3,5.32 32.28,3.3 30.104,3.3 28.896,4.508 28.896,5.471 29.25,5.825 R29.1@29.25,5.85 ; R31.2@27,4.4 27,5.9 R25.2@27.2,5.9 R30.1@28.2,5.9 29.2,5.9 R29.1@29.25,5.85
  other v2: 33,9.7
pads on no net: A1.0 A1.3 A1.4 J3.0 J4.C6 P5.0 P5.6 P5.7 P5.8 P5.10 Q1A.3 Q1A.4 Q1A.5 Q1B.3 Q1B.4 Q1B.5 SW1.0 SW1.1 U1.10 U1.32 U1.51 U1.57 U1.64 U1.70 U1.71 U1.73 U1.91 U1.92 U1.93 U1.104 U1.105 U1.106 U1.107 U1.108 U1.109 U1.110 U1.111 U1.112 U1.113 U1.114 U1.115 U1.116 U1.117 U1.118 U1.119 U1.120 U1.121 U1.122 U1.123 U1.124 U1.125 U1.126 U1.127 U2. U2.8 U2.9 U2.10 U3. U3.8 U3.9 U7.2 U7.3 U7.5 U7.9 U7.10 U7.15 U8.2 U8.3 U8.5 U8.10 U8.15

## Polygon pours and split planes (outlines as drawn)
GND on Int1 (GND) (split plane): 16.398,39.3 16.407,39.202 16.436,39.108 16.482,39.021 16.545,38.945 20.648,34.842 20.648,15.05 20.657,14.952 20.686,14.858 20.732,14.771 20.795,14.695 21.445,14.045 22.298,13.192 22.298,0.51 0.51,0.51 0.51,49.49 16.398,49.49
GND on Int1 (GND) (split plane): 49.49,0.51 23.302,0.51 23.302,13.4 23.293,13.498 23.264,13.592 23.218,13.679 23.155,13.755 22.155,14.755 21.652,15.258 21.652,35.05 21.643,35.148 21.614,35.242 21.568,35.329 21.505,35.405 17.402,39.508 17.402,49.49 49.49,49.49
SIM_1V8 on Int2 (PWR) (split plane): 49.49,0.51 31.402,0.51 31.402,15.7 31.394,15.778 31.377,15.836 31.371,15.854 31.334,15.923 31.284,15.984 29.984,17.284 29.923,17.334 29.854,17.371 29.778,17.394 29.7,17.402 27.9,17.402 27.822,17.394 27.746,17.371 27.677,17.334 27.616,17.284 26.516,16.184 26.466,16.123 26.429,16.054 26.406,15.978 26.398,15.9 26.398,0.51 0.51,0.51 0.51,49.49 49.49,49.49
3V3 on Int2 (PWR) (split plane): 30.598,15.534 30.598,0.51 27.202,0.51 27.202,15.734 28.066,16.598 29.534,16.598

## Other copper
Top Layer:
  region: 8.761,8.174 9.167,8.174 9.167,7.97 9.574,7.97 9.574,7.767 9.777,7.767 9.777,7.564 9.98,7.564 9.98,7.361 10.183,7.361 10.183,7.158 10.183,6.954 10.386,6.954 10.386,6.751 10.386,6.548 10.386,6.345 10.386,6.142 10.386,5.938 10.386,5.735 10.386,5.532 10.386,5.329 10.183,5.329 10.183,5.126 10.183,4.922 9.98,4.922 9.98,4.719 9.777,4.719 9.777,4.516 9.574,4.516 9.574,4.313 9.37,4.313 9.37,4.11 8.761,4.11 8.761,3.906 8.761,3.703 8.964,3.703 8.964,3.5 9.167,3.5 9.167,3.297 9.37,3.297 9.37,3.094 9.574,3.094 9.574,2.89 9.777,2.89 9.777,2.687 9.777,2.484 9.98,2.484 9.98,2.281 10.183,2.281 10.183,2.078 10.386,2.078 10.386,1.874 10.59,1.874 10.59,1.671 10.793,1.671 10.793,1.468 10.793,1.265 10.996,1.265 10.996,1.062 11.199,1.062 11.199,0.858 11.402,0.858 11.402,0.655 11.199,0.655 9.37,0.858 9.37,1.062 9.167,1.062 9.167,1.265 8.964,1.265 8.964,1.468 8.761,1.468 8.761,1.671 8.558,1.671 8.558,1.874 8.354,1.874 8.354,2.078 8.354,2.281 8.151,2.281 8.151,2.484 7.948,2.484 7.948,2.687 7.745,2.687 7.745,2.89 7.745,3.094 7.542,3.094 7.542,3.297 7.338,3.297 7.338,3.5 7.135,3.5 7.135,3.703 7.135,3.906 7.135,4.11 7.135,4.313 7.135,4.516 7.135,4.719 7.135,4.922 8.151,4.922 8.151,5.126 8.558,5.126 8.558,5.329 8.761,5.329 8.761,5.532 8.761,5.735 8.761,5.938 8.761,6.142 8.761,6.345 8.761,6.548 8.761,6.751 8.558,6.751 8.558,6.954 8.151,6.954 8.151,7.158 7.135,7.158 7.135,7.361 7.135,7.564 7.135,7.767 7.135,7.97 7.135,8.174 7.135,8.377 8.761,8.377
  region net GND: 19.575,7.233 20.175,7.233 20.175,7.9 20.9,7.9 20.9,10.258 20.825,10.333 20.349,10.333 20.349,9.683 19.401,9.683 19.401,10.333 18.925,10.333 18.925,8.575 18.982,8.633 19.575,8.633 19.575,7.233 20.175,7.233 20.175,7.9 20.025,8.05
  region net GND: 20.349,10.333
  region net P0.04: 40.9,49.6 40.9,48.759 40.909,48.75 41.674,48.75
  region net P0.12: 37.7,37.1 37.7,36.1 38.7,36.1
  region net GND: 34.703,22.954 35.154,22.503 34.246,22.497
  region: 6.526,8.174 6.526,7.97 6.526,7.767 6.526,7.564 6.526,7.361 6.526,7.158 6.526,6.954 6.526,6.751 6.526,6.548 6.526,6.345 6.526,6.142 6.526,5.938 6.526,5.735 6.526,5.532 6.526,5.329 6.526,5.126 6.526,4.922 6.526,4.719 6.526,4.516 6.526,4.313 6.526,4.11 6.526,3.906 6.526,3.703 6.526,3.5 6.526,3.297 6.526,3.094 6.526,2.89 6.526,2.687 6.322,2.687 6.322,2.484 6.322,2.281 6.322,2.078 6.322,1.874 6.322,1.671 6.119,1.671 6.119,1.468 6.119,1.265 5.916,1.265 5.916,1.062 5.51,1.062 5.51,0.858 5.103,0.858 5.103,0.655 3.274,0.655 3.274,0.858 2.868,0.858 2.868,1.062 2.462,1.062 2.462,1.265 2.462,1.468 2.462,1.671 2.665,1.671 2.665,1.874 2.665,2.078 2.868,2.078 2.868,2.281 2.868,2.484 3.071,2.484 3.071,2.281 3.478,2.281 3.478,2.078 4.29,2.078 4.29,2.281 4.697,2.281 4.697,2.484 4.697,2.687 4.9,2.687 4.9,2.89 4.9,3.094 4.9,3.297 4.9,3.5 4.9,3.703 4.9,3.906 4.9,4.11 4.9,4.313 4.9,4.516 4.9,4.719 4.9,4.922 4.9,5.126 4.9,5.329 4.9,5.532 4.9,5.735 4.9,5.938 4.9,6.142 4.9,6.345 4.9,6.548 4.9,6.751 4.9,6.954 4.9,7.158 4.9,7.361 4.9,7.564 4.9,7.767 4.9,7.97 4.9,8.174 4.9,8.377 6.526,8.377
  region: 16.1,16.3 17.1,16.3 16.1,16.3
  region net GND: 24.1,19.9 22.7,19.9 22.7,17.45 24.1,17.45
  region: 27.9,11.7
  region net GND: 38,32.1 38,24.9 25.1,24.9 25.1,32.1
  region net GND: 18.4,13.5 21,13.5 21,12.1 18.4,12.1
  region net GND: 14.6,35.3 15.4,35.3 15.4,34.5 14.6,34.5
  region net GND: 14.6,35.3 15.4,35.3 15.4,34.5 14.6,34.5 14.6,35.3 15.4,35.3 15.4,34.5 14.6,34.5
  region net VDD_ADXL362: 38.025,45.2 38.3,45.2 38.3,44.925
  region net RF_SW2: 16.55,14.2 16.15,13.8 17.05,13.8 16.65,14.2
  region net RF_SW1: 17.45,14.75 17.5,14.7 18.3,14.7 17.9,14.3
  region net RF_SW3: 16.4,31.8 16.4,31.3 15.9,31.8
  text "FEEL 2020" at 1.5,12.59 h1.5
  text "_________________________________________________________________" at 3.6,12.4 h0.1
  text "Javier Lopez Iniesta" at 1.7,11.3 h1
  text "Rodrigo Moratilla" at 1.75,10.357 h1
  text ".print_Date" at 2.05,9.061 h1
Bottom Layer:
  region: 30,24.8
  region net GND: 29,25.6 30.1,25.6 29,24.5
  region: 28.2,12.5
Int1 (GND) (plane layer: these items are gaps in the copper):
  lines w1: 16.9,49.6 16.9,39.3 21.15,35.05 21.15,15.05 21.8,14.4 22.8,13.4 22.8,0.4
  text "Digital GND" at 26.2,48.633 h0.4
  text "Analogical GND" at 10.3,48.533 h0.4
Int2 (PWR) (plane layer: these items are gaps in the copper):
  lines w0.8: 26.8,0.2 26.8,15.9 27.9,17 29.7,17 31,15.7 31,0.2

## Text inside footprints (layer, text, board x,y; h text height)
J4: Mechanical 15 "NO VIA / NO TRACE" at 46.018,17.507 h0.55 r270; Mechanical 15 "NO VIA / NO TRACE" at 42.716,18.269 h0.55 r270